# Altium PCB F407I.PcbDoc (part 2 of 2)
Units mm, origin at the board's own origin, x right, y up, seen from the top; angles counter-clockwise.
Board outline 140 x 100 mm, 2 copper layers (Top Layer, Bottom Layer); 101 components, 174 nets, 604 pads, 1189 vias.
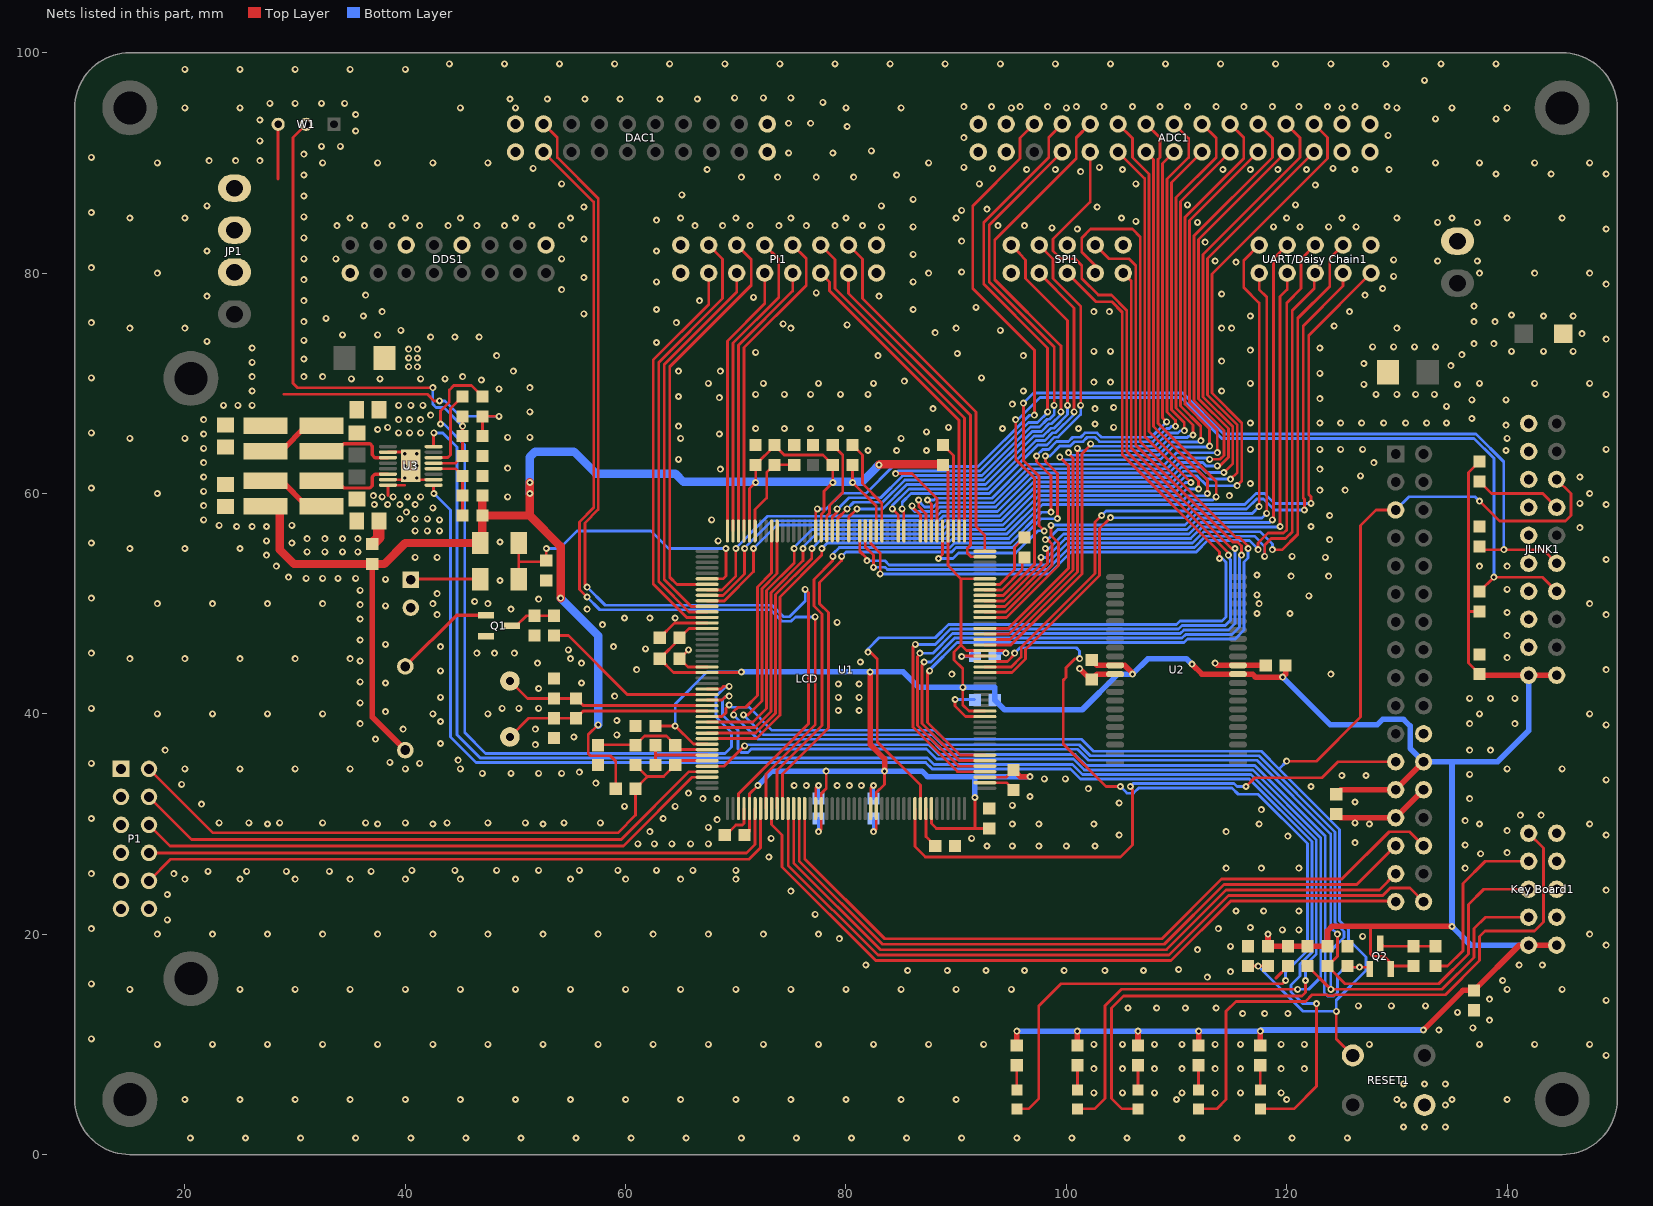
[diagram p2: the nets of this part, all layers, seen from the top]

## Via types
v1: diameter 0.635, hole 0.305, Top Layer to Bottom Layer, tented both sides, 1189 vias

## Nets (pads, with @x,y where several pads share a name; then routed paths per layer and width w, separated by ;. In a path a pad name is that pad's centre, name@x,y a point inside that pad or via, vN(x,y) a via of type N, cw(c..) or ccw(c..) an arc to the next point about the centre after c; other vN are vias at no path point) (continued)
GND: "Key Board1.3" "Key Board1.5" "Key Board1.7" "Key Board1.9" "UART/Daisy Chain1.10" ADC1.1 ADC1.2 ADC1.3 ADC1.4 ADC1.27 ADC1.28 ADC1.29 ADC1.30 BT1.2 C1.2 C2.1 C3.1 C4.2 C5.2 C6.2 C8.1 C9.1 C10.2 C11.2 C14.2 C15.2 C16.1 C17.1 C18.1 C19.1 C20.1 C21.1 C22.1 C23.1 C24.1 C25.1 C26.1 C27.1 C28.1 C29.1 C30.1 C31.1 C32.1 C33.1 C34.1 C35.1 C36.1 C37.1 C38.1 D3.1 DAC1.1 DAC1.2 DAC1.19 DAC1.20 DDS1.1 DDS1.6 DDS1.10 DDS1.16 JLINK1.4 JLINK1.6 JLINK1.8 JLINK1.10 JLINK1.12 JLINK1.14 JLINK1.16 JLINK1.18 JLINK1.20 JP1.2 JP1.3 LCD.22 LCD.26 LCD.27 P1.1 P1.3 P1.5 P1.7 P1.9 P1.11 P1.12 PI1.1 PI1.2 PI1.15 PI1.16 Power_IN1.1 Q1.2 R4.1 R7.1 R10.1 R12.1 R14.2 R21.1 R25.1 R26.1 RESET1.2 SPI1.1 SPI1.6 SPI1.10 U1.14 U1.22 U1.48 U1.61 U1.71 U1.90 U1.102 U1.113 U1.126 U1.135 U1.148 U1.158 U2.12 U2.34 U3.2 U3.7 U3.8 U3.10 U3.17 | length 91.5
  Top Layer w0.254: 38.425,59.825 U3.8@38.425,60.75 39.95,60.75 ; U3.7@38.425,61.25 U3.17@39.8,61.25 ; U3.2@38.425,63.75 U3.17@39.8,63.75 ; U3.17@41.2,61.25 U3.10@42.575,61.25 ; C20.1@63.1,46.9 64.45,48.25 U1.14@67.4,48.25 ; v1(65.7,45.8) C19.1@64.9,45 65.65,44.25 U1.22@67.4,44.25 ; C18.1@69.1,29 70,29.9 70.6,29.9 70.75,30.05 U1.48@70.75,31.4 ; U1.61@77.25,31.4 77.25,33.25 v1(77.5,33.5) ; U1.158@78.25,56.6 78.25,57.95 78.5,58.2 78.5,58.9 79.7,60.1 79.7,63.5 C21.1@78.8,64.4 ; C23.1@80.6,64.4 81.5,63.5 81.5,60.9 83.25,59.15 U1.148@83.25,56.6 ; U1.71@82.25,31.4 82.25,33.25 v1(82.5,33.5) ; C24.1@88.8,64.4 89.75,63.45 U1.135@89.75,56.6 ; v1(89.9,41.3) 89.9,40.7 90.85,39.75 U1.102@92.6,39.75 ; v1(90.5,45.2) 90.55,45.25 U1.113@92.6,45.25 ; U1.90@92.6,33.75 94.55,33.75 C25.1@95.2,33.1 ; U1.126@92.6,51.75 93.95,51.75 95.3,53.1 95.3,55.1 96.1,55.9 C2.1@96.3,55.9 ; 119,16 C33.1@120.1,17.1
  Top Layer w0.508: v1(101.2,44.1) 102.2,43.1 C28.1@102.3,43.1 102.8,43.6 U2.34@104.425,43.6 ; v1(113.5,44.6) 113.7,44.4 U2.12@115.575,44.4 C32.1@118.1,44.4 ; C30.1@124.5,30.9 124.834,30.566 LCD.27@129.887,30.566 LCD.26@132.427,33.106
  Top Layer w1.016: C29.1@37,55.4 37.6,56 C15.2@37.6,57.5
  Bottom Layer w0.254: C35.1@77.5,32.3 v1(77.5,33.5) ; C36.1@82.5,32.3 v1(82.5,33.5) ; v1(89.9,41.3) C38.1@91.65,41.3 ; v1(90.5,45.2) 91.15,45.2 91.45,45.5 C37.1@91.7,45.25
  other v1: 20.5,1.5 25.5,1.5 30.5,1.5 35.5,1.5 40.5,1.5 45.5,1.5 50.5,1.5 55.5,1.5 60.5,1.5 65.5,1.5 70.5,1.5 75.5,1.5 80.5,1.5 85.5,1.5 90.5,1.5 95.5,1.5 100.5,1.5 105.5,1.5 110.5,1.5 115.5,1.5 120.5,1.5 125.5,1.5 130.6,2.5 132.5,2.5 134.4,2.5 130.6,4.5 134.4,4.5 20,5 25,5 30,5 35,5 40,5 45,5 50,5 55,5 60,5 65,5 70,5 75,5 80,5 85,5 90,5 110,5 120,5 130,5 135,5 140,5 102.5,5.6 105.1,5.6 108,5.6 110.5,5.6 113.5,5.6 115.8,5.6 119.5,5.6 130.6,6.4 132.5,6.4 134.4,6.4 102.5,7.8 105.1,7.8 108,7.8 110.5,7.8 113.5,7.8 115.8,7.8 119.5,7.8 121.6,7.8 149,9 17.5,10 22.5,10 27.5,10 32.5,10 37.5,10 42.5,10 47.5,10 52.5,10 57.5,10 62.5,10 67.5,10 72.5,10 77.5,10 82.5,10 87.5,10 92.5,10 102.5,10 105.1,10 108,10 110.5,10 113.5,10 115.8,10 119.5,10 121.6,10 127.5,10 137.5,10 142.5,10 147.5,10 11.5,10.5 133.8,11.3 136.9,11.5 138.4,12.2 116,12.8 118,12.8 120.1,12.8 135.5,12.9 105.6,13.3 108.2,13.3 110.8,13.3 113.6,13.3 126.5,13.5 129.5,13.5 132.6,13.5 149,14 138.4,14.1 15,15 25,15 30,15 35,15 40,15 45,15 50,15 55,15 60,15 65,15 70,15 75,15 80,15 85,15 90,15 95,15 140,15 145,15 11.5,15.5 139.6,15.8 112.8,16.1 114.9,16.6 85.6,16.7 89.2,16.7 92.7,16.7 96.2,16.7 99.8,16.7 103.5,16.7 107,16.7 110.2,16.8 81.8,17.2 141.1,17.2 143.2,17.2 111.9,18.6 114.9,18.9 149,19 79.4,19.6 126.9,19.8 17.5,20 22.5,20 27.5,20 32.5,20 37.5,20 42.5,20 47.5,20 52.5,20 57.5,20 62.5,20 67.5,20 72.5,20 77.5,20 147.5,20 119.6,20.4 121.1,20.4 11.5,20.5 113.8,20.5 116.7,20.6 18.4,21.3 77.2,21.8 115.4,22.1 117.9,22.1 121.1,22.1 18.4,23.6 75,23.9 149,24 20,25 25,25 30,25 35,25 40,25 45,25 50,25 55,25 60,25 65,25 70,25 11.5,25.5 19,25.5 22.1,25.7 25.6,25.7 29.2,25.7 33.1,25.7 36.9,25.7 40.6,25.8 44.5,25.8 48.3,25.8 52.1,25.8 55.8,25.8 59.3,25.8 62.8,25.8 66.1,25.8 70,25.8 114.5,26 117.7,26 121.1,26 136.2,26 73,27 137.6,27.3 140,27.4 92.8,28 95.1,28 97.5,28 100,28 102.6,28 136.2,28.1 61.1,28.2 62.6,28.2 64.2,28.2 65.9,28.2 67.5,28.2 126.2,28.3 73.2,28.7 91.4,28.7 120.1,28.9 104.8,29 149,29 62.2,29.3 114.5,29.3 140,29.4 67.5,29.7 27.5,30 37.5,30 42.5,30 52.5,30 95.1,30 97.5,30 102.5,30 117.5,30 127.5,30 137.5,30 147.5,30 23.1,30.1 25.8,30.1 28.6,30.1 32.5,30.1 36.4,30.1 40,30.1 43.8,30.1 47.5,30.1 50.9,30.1 54.4,30.1 57.7,30.1 126.2,30.1 136.2,30.3 68.3,30.4 11.5,30.5 63.4,30.5 141.2,30.8 143.1,30.8 117.7,31.3 59.9,31.6 64.5,31.6 95.1,31.7 21.5,31.8 104.8,31.9 126.2,32 67,32.3 68.3,32.3 136.6,32.3 96.7,32.5 65.7,32.8 102,33.2 122.2,33.4 75.3,33.5 76.4,33.5 79.2,33.5 80.3,33.5 81.4,33.5 19.7,33.6 57.3,33.7 149,34 98,34.1 99.9,34.1 125,34.4 127.2,34.4 136.6,34.5 47,34.6 49.6,34.6 52.1,34.6 54.2,34.6 55.8,34.7 20,35 25,35 30,35 35,35 40,35 45,35 140,35 145,35 11.5,35.5 41.3,35.5 38.6,35.6 44.8,35.8 18.2,36.7 136.6,36.7 138.5,36.7 51.8,37.2 43.2,37.3 37.3,37.7 55.3,37.9 59.2,38.1 39.8,38.6 51.8,38.6 149,39 35.9,39.1 136.6,39.1 140.7,39.1 43.2,39.3 59.2,39.4 17.5,40 22.5,40 27.5,40 32.5,40 42.5,40 47.5,40 137.5,40 147.5,40 38.2,40.2 79.3,40.3 81.2,40.3 11.5,40.5 48.8,40.5 50.3,40.5 52.1,40.5 35.9,41 136.6,41.4 138.5,41.4 140.7,41.4 43.2,41.5 79.3,41.5 81.2,41.5 59,41.6 52.1,42.3 79.3,42.7 81.2,42.7 38.2,42.8 56,42.8 35.9,42.9 89.6,43.6 124,43.6 43.2,43.9 61,44 149,44 52,44.6 56,44.6 81.3,44.7 35.9,44.8 15,45 20,45 25,45 30,45 35,45 55,45 140,45.1 11.5,45.5 46.5,45.5 48.1,45.5 49.9,45.5 54.8,45.8 61.8,45.9 43.2,46.1 58.9,46.1 38.2,46.3 35.9,46.7 140,47.1 57.9,48.1 79.2,48.3 35.9,48.6 59.9,48.7 62.2,48.7 64.5,48.7 42.9,49 149,49 117.3,49.1 120.3,49.1 140,49.2 49.6,49.5 56.5,49.5 38.2,49.8 35.9,49.9 17.5,50 22.5,50 27.5,50 32.5,50 42.5,50 47.5,50 117.5,50 147.5,50 46.3,50.2 52.1,50.4 11.5,50.5 122,50.7 117.3,50.8 42.9,50.9 35.9,51.2 140,51.3 48.6,52.1 38.2,52.2 31,52.3 32.5,52.3 33.9,52.3 35.5,52.3 29.4,52.4 120.4,52.5 123.8,52.5 117.3,52.6 28.3,53.4 137.5,53.4 140,53.4 149,54 40.9,54.2 42.9,54.2 123.5,54.2 120.5,54.3 27.4,54.4 31.1,54.7 32.7,54.7 34.3,54.7 35.7,54.7 15,55 20,55 25,55 11.5,55.5 29.7,55.5 48.6,55.6 27.4,55.7 68.4,55.7 123.9,55.8 31.1,55.9 32.7,55.9 34.3,55.9 35.7,55.9 40.9,56.6 42,56.6 43.1,56.6 146.6,56.9 24.7,57 26.1,57 27.4,57 122.2,57 23.1,57.1 29.7,57.1 21.7,57.6 43.1,57.6 67.8,57.6 39.5,57.7 40.9,57.7 42,57.7 123.9,58 40.1,58.3 42.5,58.7 21.7,58.9 37.2,59 38.4,59 39.5,59 40.9,59 149,59 146.6,59.1 37.9,59.7 38.9,59.7 40.2,59.7 41.4,59.7 49.3,59.7 37.1,59.8 114.8,59.8 17.5,60 147.5,60 21.7,60.2 123,60.3 125.3,60.3 11.5,60.5 116.7,60.9 39.95,61.4 41.05,61.4 21.7,61.5 146.6,61.5 126.7,61.6 68.6,62.2 123,62.2 49.3,62.3 39.95,62.5 41.05,62.5 21.7,62.8 127.9,62.8 64.8,63.1 39.95,63.6 41.05,63.6 82,63.9 84.6,63.9 87.3,63.9 139.9,63.9 116.7,64 123,64 124.9,64 126.9,64 149,64 21.7,64.1 15,65 20,65 65,65 85,65 140,65 49.3,65.1 51.3,65.1 21.7,65.4 68.5,65.4 11.5,65.5 39.4,65.5 40.4,65.5 41.4,65.5 87.3,65.6 37.5,65.8 71.8,65.9 74.4,65.9 76.8,65.9 79.5,65.9 82,65.9 94.2,65.9 101.1,65.9 38.4,66 89.3,66 104.3,66 64.8,66.1 139.9,66.2 102.6,66.3 116.7,66.4 123,66.4 124.9,66.4 126.8,66.4 128.8,66.4 130.8,66.4 132.7,66.4 134.5,66.4 21.7,66.7 39.4,66.7 40.4,66.7 41.4,66.7 136.8,66.8 42.3,67.1 51.3,67.4 87.9,67.7 102.6,67.7 104.3,67.8 134.5,67.9 23.5,68 24.8,68 26.1,68 39.4,68 40.5,68 41.6,68 95.1,68.1 136.8,68.5 139.9,68.5 123,68.6 68.5,68.7 64.8,68.8 71.8,69 74.4,69 76.8,69 79.5,69 82,69 128.1,69 130,69 131.7,69 133.4,69 149,69 26.1,69.3 96.1,69.3 114.1,69.3 48.5,69.5 51.3,69.6 127,69.9 135.5,69.9 67.5,70 72.5,70 77.5,70 82.5,70 116.7,70 137.5,70 142.5,70 147.5,70 102.5,70.1 104,70.1 85.3,70.2 46.9,70.3 35.1,70.4 37.7,70.4 41.4,70.4 43.6,70.4 11.5,70.5 92.3,70.5 26.1,70.6 30.8,70.6 32.5,70.6 45.2,70.6 123,70.9 49.8,71.1 64.8,71.1 68.6,71.1 40.3,71.5 41.1,71.5 134.9,71.6 127,71.8 26.1,71.9 114.1,72 30.8,72.2 40.3,72.3 41.1,72.3 48.3,72.5 82.9,72.5 96.1,72.5 135.9,72.6 90.1,72.7 71.8,72.8 102.5,72.9 104,72.9 140.4,72.9 143.3,72.9 146,72.9 116.7,73 40.3,73.1 41.1,73.1 26.1,73.2 123,73.2 127.8,73.3 129.7,73.3 131.6,73.3 133.5,73.3 137,73.6 138.8,73.6 62.8,73.7 22,73.8 30.8,73.9 149,74 42.3,74.2 44.5,74.2 46.7,74.2 34.3,74.4 37.5,74.4 146.8,74.5 88.1,74.6 39.6,74.8 94,74.8 15,75 20,75 75,75 90,75 114.1,75 115,75 130,75 124.3,75.2 80.1,75.3 74.3,75.4 11.5,75.5 64.6,75.5 30.8,75.6 137,75.6 138.9,75.6 32.8,75.9 36.2,76.1 116.7,76.1 143.3,76.1 146,76.1 140.4,76.2 56.2,76.3 37.9,76.5 102.5,76.5 103.9,76.5 125.7,76.5 62.8,76.7 86.1,76.7 91.8,76.9 137,77 30.8,77.5 66.7,77.5 71.6,77.8 22,77.9 83,77.9 36.4,78 127.1,78 114.1,78.1 77.3,78.2 54.2,78.5 128.7,78.6 149,79 62.8,79.2 86.1,79.2 30.8,79.4 56.2,79.6 129.7,79.7 17.5,80 87.5,80 137.5,80 142.5,80 147.5,80 90.5,80.1 11.5,80.5 115.4,81 113.5,81.1 133.7,81.1 137.3,81.1 129.7,81.2 30.8,81.3 33.7,81.3 54.2,81.3 86.1,81.7 22,82 62.8,82 112.6,82.8 90.5,82.9 56.2,83.1 30.8,83.2 101,84 149,84 98.7,84.1 83.2,84.2 86.1,84.2 118.8,84.2 121.2,84.2 123.8,84.2 126.3,84.2 33.8,84.3 36.3,84.3 38.8,84.3 41.3,84.3 43.9,84.3 46.5,84.3 49,84.3 51.5,84.3 54.2,84.3 66.3,84.3 68.8,84.3 71.3,84.3 73.9,84.3 76.4,84.3 79,84.3 81.5,84.3 93.8,84.3 96.2,84.3 111.9,84.6 133.7,84.6 137.3,84.6 106.3,84.7 62.8,84.8 15,85 20,85 35,85 40,85 45,85 50,85 55,85 65,85 70,85 75,85 80,85 90,85 105,85 120,85 125,85 130,85 135,85 140,85 145,85 30.8,85.1 11.5,85.5 90.5,85.7 92.8,85.8 56.2,86 102.8,86 22,86.1 83.2,86.1 111,86.2 120.8,86.2 86.1,86.7 30.8,87 65.1,87.1 122.6,88 54.2,88.1 92.1,88.1 106.3,88.1 70.5,88.7 73.8,88.7 77.3,88.7 80.7,88.7 30.8,88.9 84.6,88.9 139,89 144,89 149,89 101.3,89.2 67.4,89.4 96.4,89.4 99,89.4 105.1,89.4 114.2,89.4 116.7,89.4 119.2,89.4 121.8,89.4 126.2,89.4 129.3,89.4 51.6,89.5 93.3,89.5 124.2,89.5 90.7,89.6 103,89.6 17.5,90 32.5,90 37.5,90 42.5,90 47.5,90 87.5,90 133.5,90 137.5,90 142.5,90 147.5,90 22.2,90.2 24.6,90.2 26.8,90.2 11.5,90.5 30.8,90.8 74.8,90.9 78.8,90.9 82.3,91.1 32.4,91.5 34.1,91.5 26.8,92 90.7,92.3 129.2,92.5 35.5,92.9 80.1,93.3 74.8,93.6 76.8,93.6 26.8,93.9 133.5,94 139,94 35.5,94.4 20,95 25,95 45,95 50,95 80,95 85,95 95,95 100,95 125,95 130,95 135,95 140,95 90.7,95.1 93.2,95.1 95.8,95.1 98.3,95.1 100.9,95.1 103.4,95.1 106,95.1 108.5,95.1 111,95.1 113.6,95.1 116.1,95.1 118.7,95.1 121.1,95.1 123.7,95.1 126.2,95.1 129.1,95.1 27.7,95.4 30,95.4 32.4,95.4 34.5,95.4 77.9,95.5 49.5,95.8 52.9,95.8 56.3,95.8 59.5,95.8 63.1,95.8 66.5,95.8 69.9,95.9 72.5,95.9 75,95.9 132.5,97.5 20,98.5 25,98.5 30,98.5 35,98.5 40,98.5 44,99 49,99 54,99 59,99 64,99 69,99 74,99 79,99 84,99 89,99 94,99 99,99 104,99 109,99 114,99 119,99 124,99 129,99 134,99 139,99
I2C_SCL: "Key Board1.4" R16.2 U1.167 | length 116.6
  Top Layer w0.254: v1(70.7,39.9) 71.056,39.9 71.078,39.878 72.378,41.177 72.378,51.352 73.75,52.725 U1.167@73.75,56.6 ; R16.2@121.9,17.1 v1(124,15) 134.1,15 137,17.9 137,20.5 138.04,21.54 141.96,21.54
  Bottom Layer w0.254: v1(70.7,39.9) 72.506,38.094 87.87,38.094 88.77,37.194 101.17,37.194 102.17,36.194 117.47,36.194 124.394,29.27 124.394,21.051 125.2,20.244 125.2,19.7 124,18.5 v1(124,15)
I2C_SDA: "Key Board1.6" R17.2 U1.168 | length 114.9
  Top Layer w0.254: v1(69.8,39.9) 69.8,40.2 70.2,40.6 70.9,40.6 71.971,41.671 71.971,51.521 73.25,52.799 U1.168@73.25,56.6 ; v1(124.6,20) 124.6,18 R17.2@123.7,17.1 125.3,15.5 133.8,15.5 136.5,18.2 136.5,22.7 137.88,24.08 141.96,24.08
  Bottom Layer w0.254: v1(69.8,39.9) 72.013,37.687 87.702,37.687 88.602,36.787 101.002,36.787 102.002,35.787 117.302,35.787 123.987,29.102 123.987,20.613 v1(124.6,20)
JTCK: JLINK1.9 R14.1 U1.137 | length 87.4
  Top Layer w0.254: v1(88.4,54.1) 88.75,54.45 U1.137@88.75,56.6 ; v1(96.1,68.2) 96.1,62.975 97.51,61.565 97.51,57.077 v1(97.993,56.593) ; R14.1@137.8,54.9 v1(139.7,54.9) 143.26,54.9 JLINK1.9@144.5,53.66
  Bottom Layer w0.254: v1(88.4,54.1) 89.7,54.1 90.2,54.6 95.4,54.6 97.407,56.607 97.993,56.607 v1(97.993,56.593) ; v1(96.1,68.2) 97.006,69.106 110.568,69.106 114.268,65.406 137.168,65.406 139.7,62.875 v1(139.7,54.9)
JTMS: JLINK1.7 R13.1 U1.124 | length 85.2
  Top Layer w0.254: U1.124@92.6,50.75 94.277,50.75 97.103,53.576 97.103,61.397 95.4,63.1 v1(95.4,66.7) ; R13.1@137.5,51.1 v1(138.8,52.4) 143.22,52.4 JLINK1.7@144.5,51.12
  Bottom Layer w0.254: v1(95.4,66.7) 95.4,66.5 97.6,68.7 110.4,68.7 114.1,65 137,65 138.8,63.2 v1(138.8,52.4)
KB_INT: "Key Board1.8" R20.2 | length 16
  Top Layer w0.254: R20.2@133.5,17.1 134.6,17.1 136,18.5 136,24.6 138.02,26.62 141.96,26.62
LCD_BL: LCD.23 U1.79 | length 54.7
  Top Layer w0.254: U1.79@86.25,31.4 86.25,27.95 87.2,27 104.9,27 106,28.1 106,33.1 105.8,33.3 v1(105.8,33.4) ; v1(116.3,33.4) 117.1,34.2 123.2,34.2 124.646,35.646 LCD.23@129.887,35.646
  Bottom Layer w0.254: v1(105.8,33.4) 106.074,33.674 115.226,33.674 115.5,33.4 116.2,33.4 v1@116.3,33.5
NetBT1_1: BT1.1 D1.1 | length 6.3
  Top Layer w0.254: BT1.1@40.5,52.23 D1.1@46.77,52.23
NetC1_1: C1.1 D1.2 D2.2 U1.6 | length 28.9
  Top Layer w0.254: D1.2@50.3,52.2 50.3,53.8 ; D2.2@50.3,55.5 50.3,53.8 ; v1(52.8,55) 52.8,53.8 50.3,53.8 ; U1.6@67.4,52.25 68.85,52.25 69.1,52.5 v1(69.1,55)
  Bottom Layer w0.254: v1(52.8,55) 54,55 55.597,56.597 62.303,56.597 63.9,55 v1(69.1,55)
NetC11_1: C11.1 L1.2 L2.1 | length 3.3
  Top Layer w0.508: L1.2@28.75,63.85 L2.1@31.05,66.15
NetC12_1: C12.1 R24.2 R25.2 U3.13 W1.2 | length 48.4
  Top Layer w0.254: W1.2@31,93.5 29.8,92.3 29.8,70 30.2,69.6 v1(42.5,69.6) ; U3.13@42.575,62.75 44.55,62.75 R25.2@45.2,63.4 R24.2@45.2,67
  Bottom Layer w0.254: v1(42.5,69.6) 42.5,68.1 42.8,67.8 43.5,67.8 v1(45.2,66.1)
NetC13_1: C13.1 R26.2 R27.2 U3.12 | length 6.5
  Top Layer w0.254: U3.12@42.575,62.25 44.55,62.25 R26.2@45.2,61.6 R27.2@45.2,58
NetC15_1: C15.1 L3.2 L4.1 | length 4.7
  Top Layer w0.508: L3.2@27.3,61.15 28.75,61.15 L4.1@31.05,58.85
NetDS1_1: DS1.1 R3.1 | length 2.2
  Top Layer w0.254: DS1.1@101,5.85 R3.1@101,8.1
NetDS2_1: DS2.1 R22.2 | length 2.2
  Top Layer w0.254: DS2.1@106.5,5.85 R22.2@106.5,8.1
NetDS2_2: DS2.2 U3.16 | length 155.4
  Top Layer w0.254: U3.16@42.575,64.25 42.575,65.475 v1(42.6,65.5) ; DS2.2@106.5,4.15 105.05,4.15 104.1,5.1 104.1,13.3 105.2,14.4 121.4,14.4 121.7,14.7 v1(121.7,15.8)
  Bottom Layer w0.254: v1(42.6,65.5) 43.4,65.5 44.7,64.2 44.7,38.1 46.8,36 87.4,36 88,35.4 100.551,35.4 101.463,34.487 116.763,34.487 122.687,28.563 122.687,18.187 121.7,17.2 v1(121.7,15.8)
NetDS3_1: DS3.1 R28.2 | length 2.2
  Top Layer w0.254: DS3.1@117.6,5.85 R28.2@117.6,8.1
NetDS3_2: DS3.2 U3.9 | length 136.2
  Top Layer w0.254: U3.9@42.575,60.75 42.575,60.025 v1(42.6,60) ; DS3.2@117.6,4.15 120.65,4.15 122.7,6.2 v1(122.7,13.7)
  Bottom Layer w0.254: v1(42.6,60) 44.1,58.5 44.1,37.9 46.406,35.594 87.232,35.594 87.832,34.994 100.382,34.994 101.295,34.081 116.595,34.081 122.281,28.395 122.281,18.356 121.2,17.275 121.2,16.2 120.4,15.4 120.4,14.756 121.456,13.7 v1(122.7,13.7)
NetDS5_1: DS5.1 R29.1 | length 2.2
  Top Layer w0.254: DS5.1@95.5,5.85 R29.1@95.5,8.1
NetJLINK1_13: JLINK1.13 R15.1 | length 8
  Top Layer w0.254: R15.1@137.5,61.1 138.6,60 143.24,60 JLINK1.13@144.5,58.74
NetKB_LED1_1: KB_LED1.1 R18.2 | length 2.2
  Top Layer w0.254: KB_LED1.1@112,5.85 R18.2@112,8.1
NetKB_LED1_2: "Key Board1.10" KB_LED1.2 | length 53
  Top Layer w0.254: KB_LED1.2@112,4.15 113.65,4.15 114.5,5 114.5,13 115.4,13.9 121.7,13.9 122.3,14.5 123.656,14.5 123.753,14.403 124.247,14.403 124.344,14.5 134.4,14.5 137.5,17.6 137.5,19.8 138,20.3 142.5,20.3 143.3,21.1 143.3,27.82 141.96,29.16
NetL2_2: L2.2 U3.3 | length 6.1
  Top Layer w0.305: L2.2@33.6,63.7 34.4,64.5 36.8,64.5 37,64.3 37,63.5 37.25,63.25 U3.3@38.425,63.25
NetL4_2: L4.2 U3.6 | length 6.1
  Top Layer w0.305: L4.2@33.6,61.3 34.4,60.5 36.8,60.5 37,60.7 37,61.5 37.25,61.75 U3.6@38.425,61.75
NetLS1_2: LS1.2 Q1.3 | length 9.3
  Top Layer w0.305: LS1.2@40,44.3 44.65,48.95 Q1.3@47.325,48.95
NetQ1_1: Q1.1 R9.1 R10.2 | length 3.8
  Top Layer w0.254: Q1.1@50.1,48 51,48.9 R9.1@53.5,48.9
NetQ2_1: Q2.1 R19.1 R20.1 | length 5.1
  Top Layer w0.254: Q2.1@128.5,19.175 128.775,18.9 R19.1@131.5,18.9 R20.1@133.5,18.9
NetR1_2: R1.2 R2.2 U1.38 | length 6.4
  Top Layer w0.254: R1.2@62.7,35.4 R2.2@62.7,37.2 ; 62.75,36.25 U1.38@67.4,36.25
NetR23_2: R23.2 U3.14 | length 7.4
  Top Layer w0.254: U3.14@42.575,63.25 43.85,63.25 44.1,63.5 44.1,67.7 R23.2@45.2,68.8
OSC_IN: C4.1 R6.2 U1.29 Y1.2 | length 18.8
  Top Layer w0.254: Y1.2@49.5,42.98 51.08,41.4 C4.1@53.5,41.4 R6.2@55.5,41.4 56.15,40.75 U1.29@67.4,40.75
OSC_OUT: C5.1 R6.1 U1.30 Y1.1 | length 18.9
  Top Layer w0.254: Y1.1@49.5,37.9 51.2,39.6 R6.1@55.5,39.6 56.15,40.25 U1.30@67.4,40.25
PA0: Q2.3 R21.2 U1.40 | length 81.7
  Top Layer w0.254: U1.40@67.4,35.25 68.95,35.25 v1(70.8,37.1) ; R21.2@125.6,17 v1(126.6,17) Q2.3@127.375,17
  Bottom Layer w0.254: v1(70.8,37.1) 70.9,37.2 87.5,37.2 88.4,36.3 100.8,36.3 101.8,35.3 117.1,35.3 123.5,28.9 123.5,15.5 123.4,15.4 123.4,14.7 123.7,14.4 124.3,14.4 124.6,14.7 124.6,16.3 125.3,17 v1(126.6,17)
PA1: P1.4 U1.41 | length 54.8
  Top Layer w0.254: P1.4@16.74,32.46 20.6,28.6 59.6,28.6 65.75,34.75 U1.41@67.4,34.75
PA2: P1.6 U1.42 | length 54
  Top Layer w0.254: P1.6@16.74,29.92 18.66,28 59.8,28 66.05,34.25 U1.42@67.4,34.25
PA3: DAC1.4 U1.47 | length 89.9
  Top Layer w0.254: DAC1.4@52.54,93.54 53.8,92.28 53.8,90.5 57.506,86.794 57.506,58.532 56.3,57.325 56.3,51.7 v1(56.5,51.5) ; U1.47@70.25,31.4 70.25,32.75 76.6,39.1 76.6,51 v1(76.3,51.3)
  Bottom Layer w0.254: v1(56.5,51.5) 58.145,49.855 73.301,49.855 74.353,48.803 74.847,48.803 76.3,50.256 v1(76.3,51.3)
PA4: P1.8 U1.50 | length 58.6
  Top Layer w0.254: P1.8@16.74,27.38 70.98,27.38 71.75,28.15 U1.50@71.75,31.4
PA5: P1.10 U1.51 | length 60.3
  Top Layer w0.254: P1.10@16.74,24.84 18.7,26.8 71.2,26.8 72.25,27.85 U1.51@72.25,31.4
PA6: DAC1.3 U1.52 | length 84.1
  Top Layer w0.254: DAC1.3@52.54,91 57.1,86.44 57.1,58.7 55.8,57.4 55.8,51.3 v1(56.5,50.6) ; U1.52@72.75,31.4 72.75,34.55 77.2,39 v1(77.2,48.8)
  Bottom Layer w0.254: v1(56.5,50.6) 57.651,49.449 73.132,49.449 74.184,48.397 75.016,48.397 75.419,48.8 v1(77.2,48.8)
PA7: LCD.33 U1.53 | length 67.1
  Top Layer w0.254: U1.53@73.25,31.4 73.25,29.95 74.2,29 74.2,26.1 82.695,17.605 109.505,17.605 114.915,23.015 LCD.33@129.887,23.015
PA9: "UART/Daisy Chain1.2" U1.120 | length 57.2
  Top Layer w0.254: U1.120@92.6,48.75 94.576,48.75 99.3,53.474 99.3,55.5 98.6,56.2 v1(98.6,57.1) ; v1(117.5,58.8) 117.5,77.3 116.1,78.7 116.1,81.14 117.5,82.54
  Bottom Layer w0.254: v1(98.6,57.1) 98.551,57.1 98.526,57.126 110.777,57.126 111.826,58.174 116.874,58.174 v1(117.5,58.8)
PA10: "UART/Daisy Chain1.1" U1.121 | length 53.7
  Top Layer w0.254: U1.121@92.6,49.25 94.502,49.25 98.703,53.452 98.703,55.403 98.307,55.8 v1(98.1,55.8) ; 117.5,80 117.5,78.5 118.183,77.817 v1(118.183,58.197)
  Bottom Layer w0.254: v1(98.1,55.8) 98.3,55.8 99.219,56.719 110.946,56.719 111.994,57.768 117.754,57.768 v1(118.183,58.197)
PA11: "UART/Daisy Chain1.4" U1.122 | length 55.9
  Top Layer w0.254: U1.122@92.6,49.75 94.427,49.75 98.297,53.62 98.297,54.803 v1(98.1,55) ; v1(118.7,57.6) 118.8,57.7 118.8,81.3 120.04,82.54
  Bottom Layer w0.254: v1(98.1,55) 98.425,55 99.738,56.313 111.114,56.313 112.163,57.362 118.462,57.362 v1(118.7,57.6)
PA12: "UART/Daisy Chain1.3" U1.123 | length 53.2
  Top Layer w0.254: U1.123@92.6,50.25 94.352,50.25 97.7,53.598 v1(97.7,54.2) ; v1(119.4,57) 119.4,77.86 120.04,78.5 120.04,80
  Bottom Layer w0.254: v1(97.7,54.2) 98.2,54.2 99.906,55.906 111.282,55.906 112.331,56.955 119.355,56.955 v1(119.4,57)
PA15: ADC1.8 U1.138 | length 55.3
  Top Layer w0.254: v1(84.5,61.8) 86,61.8 88.25,59.55 U1.138@88.25,56.6 ; v1(98.3,67.4) 98.3,73.2 92.5,79 92.5,84.6 98.4,90.5 98.4,92.32 ADC1.8@99.62,93.54
  Bottom Layer w0.254: v1(84.5,61.8) 84.732,62.032 92.158,62.032 96.565,66.438 97.39,66.438 v1@98.326,67.374
PB0: LCD.34 U1.56 | length 69.2
  Top Layer w0.254: U1.56@74.75,31.4 74.75,26.25 82.9,18.1 109.3,18.1 114.71,23.51 128.71,23.51 129.4,24.2 131.173,24.2 LCD.34@132.427,22.946
PB1: LCD.31 U1.57 | length 65.7
  Top Layer w0.254: U1.57@75.25,31.4 75.25,26.45 83.105,18.595 109.095,18.595 114.505,24.005 128.406,24.005 LCD.31@129.887,25.486
PB2: LCD.29 U1.58 | length 65.7
  Top Layer w0.254: U1.58@75.75,31.4 75.75,26.65 83.31,19.09 108.89,19.09 114.3,24.5 126.361,24.5 LCD.29@129.887,28.026
PB11: SPI1.5 U1.80 | length 88.5
  Top Layer w0.254: v1(82,45.6) 82.2,45.6 82.836,44.964 82.836,37.441 86.75,33.527 U1.80@86.75,31.4 ; SPI1.5@100.08,80 102.68,77.4 104.125,77.4 105.074,76.451 105.074,63.526 113.9,54.7 v1(113.9,54.1)
  Bottom Layer w0.254: v1(82,45.6) 82,45.9 83,46.9 88.1,46.9 89.294,48.094 109.995,48.094 110.327,48.426 114.126,48.426 114.497,48.797 114.497,53.759 114.156,54.1 v1(113.9,54.1)
PB12: ADC1.9 U1.92 | length 97.3
  Top Layer w0.254: v1@86.297,46.3 86.094,46.097 86.094,44.643 86.087,44.637 86.087,38.788 90.125,34.75 U1.92@92.6,34.75 ; ADC1.9@102.16,91 102.16,86.46 98.8,83.1 98.8,82 99.5,81.3 100.8,81.3 101.4,80.7 101.4,79.5 102.9,78 104.1,78 105.481,76.619 105.481,63.819 114.7,54.6 v1(114.7,54.4)
  Bottom Layer w0.254: v1(86.3,46.3) 88.1,46.3 89.487,47.687 110.163,47.687 110.495,48.019 114.426,48.019 114.903,48.496 114.903,53.978 114.7,54.181 v1(114.7,54.4)
PB13: SPI1.9 U1.93 | length 80.1
  Top Layer w0.254: v1(86.7,45.5) 86.8,45.5 86.5,45.2 86.5,44.475 86.494,44.468 86.494,38.956 90.199,35.25 U1.93@92.6,35.25 ; SPI1.9@105.16,79.537 105.623,79.537 105.887,79.273 105.887,64.113 115,55 v1(115.3,55)
  Bottom Layer w0.254: v1(86.7,45.5) 87.9,45.5 89.681,47.281 110.331,47.281 110.663,47.613 114.727,47.613 115.31,48.195 115.31,54.146 115.297,54.159 115.297,54.641 115.31,54.654 115.31,54.99 v1(115.3,55)
PB14: SPI1.8 U1.94 | length 83.9
  Top Layer w0.254: 86.9,44.4 86.9,39.124 90.274,35.75 U1.94@92.6,35.75 ; SPI1.8@102.62,82.54 103.86,81.3 105.7,81.3 106.294,80.706 106.294,64.406 115.103,55.597 115.547,55.597 115.897,55.247 115.897,54.928 115.9,54.925 v1(115.9,54.4)
  Bottom Layer w0.254: v1(87.1,44.7) 87.7,44.7 89.874,46.874 110.5,46.874 110.832,47.206 115.028,47.206 115.716,47.895 115.716,54.216 v1(115.9,54.4)
PB15: SPI1.7 U1.95 | length 91.3
  Top Layer w0.254: v1(87.6,43.9) 87.5,43.9 87.4,43.8 87.4,39.199 90.349,36.25 U1.95@92.6,36.25 ; SPI1.7@102.62,80 102.62,80.68 101.4,81.9 101.4,83.2 102.2,84 106,84 106.7,83.3 106.7,64.7 115.397,56.003 115.716,56.003 116.5,55.219 v1@116.5,54.9 ; v1@116.5,54.9 v1(116.5,55)
  Bottom Layer w0.254: v1(87.6,43.9) 87.6,44 90.068,46.468 110.668,46.468 111,46.8 115.328,46.8 116.123,47.594 116.123,53.778 116.497,54.153 116.497,55.003 v1(116.5,55)
PC0: ADC1.11 U1.32 | length 92.8
  Top Layer w0.254: U1.32@67.4,39.25 71.55,39.25 72.784,40.484 72.784,51.184 75.3,53.7 v1(75.3,55) ; ADC1.11@104.7,91 107.106,88.594 107.106,65.194 v1(111.3,61)
  Bottom Layer w0.254: v1@75.2,55 76.919,56.719 79.146,56.719 79.158,56.732 88.758,56.732 89.158,57.132 94.258,57.132 97.346,60.219 110.019,60.219 110.8,61 v1(111.3,61)
PC1: ADC1.12 U1.33 | length 96.7
  Top Layer w0.254: U1.33@67.4,38.75 71.726,38.75 73.19,40.215 73.19,50.99 76.1,53.9 v1(76.1,55) ; ADC1.12@104.7,93.54 106,92.24 106,90.5 107.513,88.987 107.513,65.631 112,61.144 v1(112,60.4)
  Bottom Layer w0.254: v1@76.061,55.082 77.291,56.313 79.314,56.313 79.327,56.326 88.927,56.326 89.327,56.726 94.427,56.726 97.514,59.813 110.313,59.813 110.9,60.4 v1(112,60.4)
PC2: ADC1.13 U1.34 | length 94.5
  Top Layer w0.254: U1.34@67.4,38.25 71.801,38.25 73.597,40.046 73.597,50.822 76.9,54.125 v1(76.9,55) ; ADC1.13@107.24,91 107.919,90.321 107.919,66.081 112.8,61.2 v1(112.8,60)
  Bottom Layer w0.254: v1(76.9,55) 77.806,55.906 79.482,55.906 79.495,55.919 89.095,55.919 89.495,56.319 94.595,56.319 97.682,59.406 110.606,59.406 111,59.8 112.6,59.8 v1(112.8,60)
PC3: ADC1.14 U1.35 | length 98.5
  Top Layer w0.254: U1.35@67.4,37.75 71.875,37.75 74.003,39.878 74.003,50.603 77.8,54.4 v1(77.8,55) ; ADC1.14@107.24,93.54 108.5,92.28 108.5,90.5 108.326,90.326 108.326,66.374 113.6,61.1 v1(113.6,59.7)
  Bottom Layer w0.254: v1(77.8,55) 78.3,55.5 79.651,55.5 79.663,55.513 89.263,55.513 89.663,55.913 94.763,55.913 97.851,59 110.9,59 111.294,59.394 113.294,59.394 v1(113.6,59.7)
PC4: ADC1.15 U1.54 | length 91.1
  Top Layer w0.254: U1.54@73.75,31.4 73.75,34.85 77.834,38.934 77.834,48.7 77.834,49.066 77.1,49.8 77.1,52.2 78.8,53.9 v1(78.8,54.3) ; v1(97.3,63.4) 97.3,62.9 98.6,61.6 v1(98.6,58.3) ; v1(109.1,66.5) 108.732,66.868 108.732,89.952 ADC1.15@109.78,91
  Bottom Layer w0.254: v1@78.8,54.5 79.394,55.094 79.819,55.094 79.832,55.106 89.432,55.106 89.832,55.506 94.932,55.506 97.725,58.3 v1(98.6,58.3) ; v1(97.3,63.4) 97.3,63.444 97.856,64 98.4,64 99.103,64.703 100.184,64.703 100.584,65.103 101.303,65.103 101.703,65.503 102.797,65.503 103.194,65.106 107.706,65.106 v1(109.1,66.5)
PC5: ADC1.16 U1.55 | length 95.3
  Top Layer w0.254: U1.55@74.25,31.4 74.25,34.55 78.4,38.7 78.4,48.7 78.4,49.2 77.606,49.994 77.606,51.906 79.6,53.9 v1(79.6,54.3) ; v1(98.1,63.4) 98.1,62.9 99.197,61.803 99.197,57.735 v1(99.184,57.722) ; ADC1.16@109.78,93.54 111.1,92.22 111.1,90.5 109.138,88.538 109.138,67.4 109.9,66.639 v1(109.9,66.1)
  Bottom Layer w0.254: v1(79.6,54.3) 80,54.7 89.6,54.7 90,55.1 95.1,55.1 97.7,57.7 99.161,57.7 v1(99.184,57.722) ; v1(98.1,63.4) 98.5,63.4 99.397,64.297 100.353,64.297 100.753,64.697 101.247,64.697 101.25,64.694 101.468,64.694 101.475,64.7 101.5,64.7 101.897,65.097 102.603,65.097 103,64.7 107.875,64.7 109.078,65.903 109.347,65.903 109.544,66.1 v1(109.9,66.1)
PC6: ADC1.17 U1.115 | length 59.7
  Top Layer w0.254: U1.115@92.6,46.25 94.95,46.25 101.406,52.706 101.406,63.606 102.2,64.4 v1(102.2,64.5) ; v1(110.7,65.7) 110.7,66.445 109.545,67.6 109.545,88.225 ADC1.17@112.32,91
  Bottom Layer w0.254: v1(102.2,64.5) 102.416,64.283 107.218,64.283 107.228,64.294 108.043,64.294 109.246,65.497 110.141,65.497 110.134,65.503 110.147,65.503 110.344,65.7 v1(110.7,65.7)
PC7: ADC1.18 U1.116 | length 64.4
  Top Layer w0.254: U1.116@92.6,46.75 94.875,46.75 101,52.875 v1(101,64.1) ; v1(111.5,65.3) 111.5,66.22 109.951,67.768 109.951,86.851 113.6,90.5 113.6,92.26 ADC1.18@112.32,93.54
  Bottom Layer w0.254: v1(101,64.1) 101.223,63.877 107.386,63.877 107.397,63.887 108.211,63.887 109.414,65.09 110.99,65.09 111.1,65.2 111.5,65.2 v1(111.5,65.3) v1@111.4,65.3
PC8: ADC1.19 U1.117 | length 62.7
  Top Layer w0.254: U1.117@92.6,47.25 94.801,47.25 100.594,53.043 100.594,63.206 100.2,63.6 v1(100.2,63.7) ; v1(112.2,64.8) 112.2,66.094 110.358,67.937 110.358,86.498 ADC1.19@114.86,91
  Bottom Layer w0.254: v1(100.2,63.7) 100.429,63.47 107.555,63.47 107.565,63.481 108.38,63.481 109.583,64.684 112.084,64.684 v1(112.2,64.8)
PC9: ADC1.20 U1.118 | length 67.4
  Top Layer w0.254: U1.118@92.6,47.75 94.726,47.75 100.187,53.211 100.187,62.513 v1(99.4,63.3) ; v1(113,64.3) 113,65.869 110.764,68.105 110.764,85.064 116.1,90.4 116.1,92.3 ADC1.20@114.86,93.54
  Bottom Layer w0.254: v1(99.4,63.3) 99.636,63.064 107.723,63.064 107.733,63.074 108.548,63.074 109.677,64.203 112.903,64.203 v1(113,64.3)
PC10: ADC1.21 U1.139 | length 62
  Top Layer w0.254: v1(87.4,59.4) 87.75,59.05 U1.139@87.75,56.6 ; v1(113.7,63.7) 113.7,65.744 111.17,68.273 111.17,84.77 ADC1.21@117.4,91
  Bottom Layer w0.254: v1(87.4,59.4) 87.978,59.4 88.148,59.57 93.248,59.57 96.336,62.658 108.958,62.658 110,63.7 v1(113.7,63.7)
PC11: ADC1.22 U1.140 | length 67.8
  Top Layer w0.254: 86.6,58.8 87.25,58.15 U1.140@87.25,56.6 ; 86.6,58.8 v1(86.6,59.4) ; v1(113,63.1) 113.944,63.1 114.297,63.453 114.297,65.722 111.587,68.431 111.587,83.387 118.7,90.5 118.7,92.24 ADC1.22@117.4,93.54
  Bottom Layer w0.254: v1(86.6,59.4) 86.6,59.3 87.136,58.764 87.917,58.764 88.317,59.164 93.417,59.164 96.504,62.251 109.151,62.251 110.126,63.226 112.874,63.226 v1(113,63.1)
PC12: ADC1.23 U1.141 | length 66.1
  Top Layer w0.254: v1(86.003,58.884) 86.003,58.797 86.75,58.05 U1.141@86.75,56.6 ; v1(113.7,62.5) 113.919,62.5 114.703,63.284 114.703,65.89 111.994,68.6 111.994,83.054 ADC1.23@119.94,91
  Bottom Layer w0.254: v1(86.003,58.884) 86.003,58.597 86.242,58.358 88.085,58.358 88.485,58.758 93.585,58.758 96.672,61.845 109.32,61.845 110.295,62.82 112.38,62.82 112.7,62.5 v1(113.7,62.5)
PC13: ADC1.24 U1.8 | length 90.5
  Top Layer w0.254: U1.8@67.4,51.25 68.75,51.25 70,52.5 v1(70,55) ; v1(114.3,61.9) 115.11,62.71 115.11,66.058 112.4,68.768 112.4,81.7 121.2,90.5 121.2,92.28 ADC1.24@119.94,93.54
  Bottom Layer w0.254: v1(70,55) 70,55.044 72.894,57.938 78.641,57.938 78.653,57.951 88.253,57.951 88.653,58.351 93.753,58.351 96.841,61.438 109.488,61.438 110.463,62.414 112.186,62.414 112.697,61.903 114.297,61.903 v1(114.3,61.9)
PC14: ADC1.25 U1.9 | length 88.9
  Top Layer w0.254: U1.9@67.4,50.75 68.85,50.75 70.8,52.7 v1(70.8,55) ; v1(114.9,61.3) 115.516,61.916 115.516,66.227 112.806,68.936 112.806,81.326 ADC1.25@122.48,91
  Bottom Layer w0.254: v1(70.8,55) 70.8,55.044 73.288,57.532 78.809,57.532 78.822,57.545 88.422,57.545 88.822,57.945 93.922,57.945 97.009,61.032 98.495,61.032 109.656,61.032 110.631,62.007 112.018,62.007 112.722,61.303 114.897,61.303 v1(114.9,61.3)
PC15: ADC1.26 U1.10 | length 93.4
  Top Layer w0.254: U1.10@67.4,50.25 68.95,50.25 71.6,52.9 v1(71.6,55) ; v1(115.5,60.7) 115.923,61.123 115.923,66.395 113.213,69.105 113.213,79.913 123.7,90.4 123.7,92.32 ADC1.26@122.48,93.54
  Bottom Layer w0.254: v1(71.6,55) 73.726,57.126 78.977,57.126 78.99,57.138 88.59,57.138 88.99,57.538 94.09,57.538 97.177,60.626 109.826,60.626 110.8,61.6 111.851,61.6 112.747,60.703 115.497,60.703 v1(115.5,60.7)
PD2: SPI1.4 U1.144 | length 39.1
  Top Layer w0.254: v1(85.1,58.6) 85.25,58.45 U1.144@85.25,56.6 ; SPI1.4@97.54,82.54 98.8,81.28 98.8,79.5 101.3,77 v1(101.3,68)
  Bottom Layer w0.254: v1(85.1,58.6) 85.1,59.2 85.9,60 93,60 97.406,64.406 98.232,64.406 98.935,65.11 99.254,65.11 101.297,67.153 101.297,67.997 v1(101.3,68)
PD3: SPI1.3 U1.145 | length 36.6
  Top Layer w0.254: v1(84.2,58.6) 84.75,58.05 U1.145@84.75,56.6 ; SPI1.3@97.54,80 100.7,76.84 v1(100.7,67.4)
  Bottom Layer w0.254: v1(84.2,58.6) 84.2,58.9 85.706,60.406 92.832,60.406 97.238,64.813 98.063,64.813 98.766,65.516 99.035,65.516 100.7,67.181 v1(100.7,67.4)
PD6: "UART/Daisy Chain1.6" U1.150 | length 71
  Top Layer w0.254: U1.150@82.25,56.6 82.25,55.45 83.1,54.6 v1(83.1,52.7) ; v1(117.4,54.9) 117.4,55.5 118.3,56.4 119.7,56.4 120,56.7 120,77.3 121.3,78.6 121.3,81.26 122.58,82.54
  Bottom Layer w0.254: v1(83.1,52.7) 83.1,52.831 83.243,52.687 98.437,52.687 100.437,54.687 111.787,54.687 112.818,55.718 116.626,55.718 117.4,54.944 v1(117.4,54.9)
PD7: "UART/Daisy Chain1.5" U1.151 | length 70
  Top Layer w0.254: U1.151@81.75,56.6 81.75,55.15 82.5,54.4 v1(82.5,53.3) ; v1(118,54.3) 118,55.3 118.6,55.9 119.9,55.9 120.5,56.5 120.5,76.6 122.5,78.6 122.5,79.92
  Bottom Layer w0.254: v1(82.5,53.3) 83.544,53.3 83.751,53.094 98.268,53.094 100.268,55.094 111.619,55.094 112.65,56.124 117.076,56.124 118,55.2 v1(118,54.3)
PDR_ON: R11.2 R12.2 U1.171 | length 8.5
  Top Layer w0.254: U1.171@71.75,56.6 71.75,58.55 72.8,59.6 72.8,61.9 R11.2@73.5,62.6 R12.2@75.3,62.6
PF8: R23.1 U1.26 | length 70.2
  Top Layer w0.254: v1(43.2,66.3) 43.2,67.5 44,68.3 44,69.4 44.4,69.8 46,69.8 R23.1@47,68.8 ; U1.26@67.4,42.25 68.65,42.25 68.9,42.5 v1(69.4,42.5)
  Bottom Layer w0.254: v1(43.2,66.3) 43.5,66.3 45.4,64.4 45.4,38.3 47.294,36.406 69.006,36.406 69.6,37 69.6,38.3 68.2,39.7 68.2,41.6 69.1,42.5 v1(69.4,42.5)
PF9: R9.2 U1.27 | length 16.1
  Top Layer w0.254: R9.2@53.5,47.1 54.8,47.1 60.15,41.75 U1.27@67.4,41.75
PF10: DS1.2 U1.28 | length 109
  Top Layer w0.254: U1.28@67.4,41.25 68.75,41.25 69.1,41.6 v1(69.4,41.6) ; DS1.2@101,4.15 102.55,4.15 103.5,5.1 103.5,13.5 105,15 v1(121,15)
  Bottom Layer w0.254: v1(69.4,41.6) 69.1,41.6 68.803,41.303 68.803,39.897 70.2,38.5 70.2,36.8 70.5,36.5 71.106,36.5 71.4,36.794 87.306,36.794 88.206,35.894 100.632,35.894 101.632,34.894 116.932,34.894 123.094,28.732 123.094,16.094 122,15 v1(121,15)
PF11: LCD.30 U1.59 | length 68.3
  Top Layer w0.254: U1.59@76.25,31.4 76.25,26.85 83.515,19.585 108.685,19.585 114.095,24.995 124.995,24.995 129.3,29.3 131.153,29.3 LCD.30@132.427,28.026
PG6: "UART/Daisy Chain1.7" U1.110 | length 62
  Top Layer w0.254: U1.110@92.6,43.75 95.075,43.75 96.303,44.978 96.303,45.853 103.013,52.562 103.013,56.813 v1(104,57.8) ; v1(121.6,58.5) 121.6,59.5 121.5,59.6 121.5,75.2 125.12,78.82 125.12,80
  Bottom Layer w0.254: v1(104,57.8) 110.877,57.8 111.658,58.581 116.356,58.581 117.275,59.5 117.9,59.5 118.9,58.5 v1(121.6,58.5)
PG7: "UART/Daisy Chain1.9" U1.111 | length 63.1
  Top Layer w0.254: U1.111@92.6,44.25 95.001,44.25 95.897,45.146 95.897,46.021 102.606,52.731 102.606,57.406 v1(103.2,58) ; v1(122.2,59.1) 122.2,59.7 122,59.9 122,74.34 127.66,80
  Bottom Layer w0.254: v1(103.2,58) 103.6,58.4 110.902,58.4 111.489,58.987 116.187,58.987 117.2,60 118,60 118.9,59.1 v1(122.2,59.1)
PG8: DS5.2 U1.112 | length 92.2
  Top Layer w0.254: U1.112@92.6,44.75 94.65,44.75 v1@95.35,45.45 ; DS5.2@95.5,4.15 96.55,4.15 97.5,5.1 97.5,13.5 99.5,15.5 119.6,15.5 v1(119.9,15.8) ; v1(101.2,45) 100.775,45 99.961,44.186 99.961,43.286 99.723,43.048 99.723,37.277 103.6,33.4 v1(104.9,33.4)
  Bottom Layer w0.254: v1(95.3,45.5) 95.8,46 100.9,46 101.2,45.7 v1(101.2,45) ; v1(104.9,33.4) 105.5,32.8 106.1,32.8 106.568,33.268 115.032,33.268 115.6,32.7 117.401,32.7 121.874,28.227 121.874,18.524 119.9,16.549 v1(119.9,15.8)
PG9: "UART/Daisy Chain1.8" U1.152 | length 73
  Top Layer w0.254: U1.152@81.25,56.6 81.25,54.75 81.9,54.1 v1(81.9,53.9) ; v1(118.7,54.9) 119.6,54.9 121,56.3 121,75.9 123.9,78.8 123.9,81.32 125.12,82.54
  Bottom Layer w0.254: v1(81.9,53.9) 83.519,53.9 83.919,53.5 98.1,53.5 100.1,55.5 111.451,55.5 112.481,56.531 117.569,56.531 118.7,55.4 v1(118.7,54.9)
PG11: SPI1.2 U1.154 | length 42.5
  Top Layer w0.254: U1.154@80.25,56.6 80.25,57.85 v1(81,58.6) ; SPI1.2@95,82.54 95.734,81.806 95.734,81.766 96.3,81.2 96.3,79.5 100.1,75.7 v1(100.1,68)
  Bottom Layer w0.254: v1(81,58.6) 83.3,58.6 85.513,60.813 92.663,60.813 97.07,65.219 97.895,65.219 98.598,65.922 98.867,65.922 100.097,67.153 100.097,67.997 v1(100.1,68)
PG13: ADC1.10 U1.156 | length 57.7
  Top Layer w0.254: U1.156@79.25,56.6 79.25,57.75 v1(80.1,58.6) ; v1(99.5,67.4) 99.5,73.4 93.5,79.4 93.5,83 100.9,90.4 100.9,92.28 ADC1.10@102.16,93.54
  Bottom Layer w0.254: v1(80.1,58.6) 80.7,59.2 83.319,59.2 85.338,61.219 92.495,61.219 96.901,65.626 97.727,65.626 98.43,66.329 98.648,66.329 99.5,67.181 v1(99.5,67.4)
PG14: ADC1.7 U1.157 | length 54.5
  Top Layer w0.254: U1.157@78.75,56.6 78.75,57.85 79.2,58.3 v1(79.2,58.6) ; v1(98.9,68) 98.9,73.3 93,79.2 93,84.38 ADC1.7@99.62,91
  Bottom Layer w0.254: v1(79.2,58.6) 79.256,58.6 80.262,59.606 83.151,59.606 85.097,61.553 85.097,61.572 85.151,61.626 92.327,61.626 96.733,66.032 97.558,66.032 98.261,66.735 98.479,66.735 98.9,67.156 v1(98.9,68)
PG15: ADC1.6 U1.160 | length 56.4
  Top Layer w0.254: U1.160@77.25,56.6 77.25,58.55 77.3,58.6 v1(77.4,58.6) ; ADC1.6@97.08,93.54 95.8,92.26 95.8,90.4 91.5,86.1 91.5,78.6 97.1,73 v1(97.1,67.1)
  Bottom Layer w0.254: v1(77.4,58.6) 78.2,58.6 79.613,60.013 81.813,60.013 84.238,62.438 91.99,62.438 96.652,67.1 v1(97.1,67.1)
PI0: PI1.14 U1.132 | length 32.9
  Top Layer w0.254: PI1.14@80.24,82.54 81.5,81.28 81.5,77.7 91.8,67.4 91.8,57 92.6,56.2 U1.132@92.6,54.75
PI1: PI1.13 U1.131 | length 31.9
  Top Layer w0.254: PI1.13@80.24,80 80.24,78.16 91.3,67.1 91.3,55.3 91,55 91,54.6 91.35,54.25 U1.131@92.6,54.25
PI2: PI1.12 U1.133 | length 31.3
  Top Layer w0.254: PI1.12@77.7,82.54 79,81.24 79,78.607 90.75,66.857 U1.133@90.75,56.6
PI3: PI1.11 U1.134 | length 28.6
  Top Layer w0.254: PI1.11@77.7,80 78.5,79.2 78.5,78.4 90.25,66.65 U1.134@90.25,56.6
PI4: PI1.10 U1.173 | length 28.8
  Top Layer w0.254: U1.173@70.75,56.6 70.75,73.25 76.4,78.9 76.4,81.3 PI1.10@75.16,82.54
PI5: PI1.9 U1.174 | length 25.4
  Top Layer w0.254: U1.174@70.25,56.6 70.25,73.45 75.16,78.36 PI1.9@75.16,80
PI6: PI1.8 U1.175 | length 28.2
  Top Layer w0.254: U1.175@69.75,56.6 69.75,73.65 73.9,77.8 73.9,81.26 PI1.8@72.62,82.54
PI7: PI1.7 U1.176 | length 24.8
  Top Layer w0.254: U1.176@69.25,56.6 69.25,73.85 72.62,77.22 PI1.7@72.62,80
PI8: PI1.6 U1.7 | length 37.4
  Top Layer w0.254: U1.7@67.4,51.75 64.65,51.75 64,52.4 64,71.5 71.4,78.9 71.4,81.22 PI1.6@70.08,82.54
PI9: PI1.5 U1.11 | length 35.4
  Top Layer w0.254: U1.11@67.4,49.75 65.95,49.75 63.5,52.2 63.5,71.7 70.08,78.28 PI1.5@70.08,80
PI10: PI1.4 U1.12 | length 39
  Top Layer w0.254: U1.12@67.4,49.25 65.75,49.25 63,52 63,71.9 68.8,77.7 68.8,81.28 PI1.4@67.54,82.54
PI11: PI1.3 U1.13 | length 36.5
  Top Layer w0.254: U1.13@67.4,48.75 65.55,48.75 62.5,51.8 62.5,72.1 67.54,77.14 PI1.3@67.54,80
RESET: C6.1 JLINK1.15 LCD.5 R8.2 RESET1.1 U1.31 | length 148.4
  Top Layer w0.254: U1.31@67.4,39.75 68.75,39.75 69.1,40.1 69.1,40.5 v1(69.4,40.8) ; C6.1@116.5,17.1 v1(117.4,17.1) R8.2@118.3,17.1 ; v1(120,35.7) 122.7,35.7 126.7,39.7 126.7,57.1 128.106,58.506 LCD.5@129.887,58.506 ; v1(124.5,13) 124.5,10.5 RESET1.1@126,9 ; v1(137.5,59.3) 139.3,57.5 145.3,57.5 145.8,58 145.8,59.98 JLINK1.15@144.5,61.28
  Bottom Layer w0.254: v1(69.4,40.8) 69.597,40.603 71.197,40.603 73.3,38.5 88.1,38.5 88.9,37.7 101.356,37.7 102.456,36.6 117.7,36.6 119.3,35 ; v1(117.4,17.1) 121.494,13.006 124.494,13.006 v1(124.5,13) 124.5,14 127.2,16.7 127.2,17.938 125.606,19.532 125.606,20.412 124.8,21.219 124.8,29.5 119.3,35 ; v1(120,35.7) 119.3,35 ; LCD.5@129.887,58.506 131.081,59.7 137.1,59.7 v1(137.5,59.3)
VCAP1: C3.2 U1.81 | length 3.8
  Top Layer w0.254: U1.81@87.25,31.4 87.25,28.85 C3.2@88.1,28
VCAP2: C2.2 U1.125 | length 4.9
  Top Layer w0.254: U1.125@92.6,51.25 94.15,51.25 96,53.1 C2.2@96,53.8
VCC: "Key Board1.1" "Key Board1.2" C13.2 C14.1 C18.2 C19.2 C20.2 C21.2 C22.2 C23.2 C24.2 C25.2 C26.2 C27.2 C28.2 C29.2 C30.2 C31.2 C32.2 C33.2 C34.2 C35.2 C36.2 C37.2 C38.2 D2.1 JLINK1.1 JLINK1.2 L3.1 LCD.24 LCD.25 LS1.1 Q2.2 R3.2 R5.2 R8.1 R11.1 R13.2 R15.2 R16.1 R17.1 R18.1 R19.2 R22.1 R27.1 R28.1 R29.2 U1.15 U1.23 U1.36 U1.49 U1.62 U1.72 U1.82 U1.91 U1.103 U1.114 U1.127 U1.136 U1.149 U1.159 U1.172 U2.11 U2.33 | length 520.6
  Top Layer w0.254: v1(57.5,39) 56.6,38.1 56.6,36.4 56.8,36.2 58.6,36.2 59.1,35.7 R5.2@59.1,33.2 ; C27.2@62.7,38.9 v1(64.5,38.9) 66.15,37.25 U1.36@67.4,37.25 ; U1.15@67.4,47.75 65.75,47.75 C20.2@64.9,46.9 64.9,46.8 C19.2@63.1,45 64.35,43.75 U1.23@67.4,43.75 v1@70.45,43.75 ; C18.2@71.25,29.35 U1.49@71.25,31.4 71.25,32.75 v1(72,33.5) ; U1.172@71.25,56.6 71.25,60.45 v1(71.8,61) C22.2@71.8,62.6 R11.1@73.5,64.3 ; R11.1@73.5,64.4 74.4,63.5 77.9,63.5 C21.2@78.8,62.6 v1(78.8,61) 77.997,60.197 77.997,58.353 77.75,58.106 U1.159@77.75,56.6 ; v1(77.5,29.3) 77.75,29.55 U1.62@77.75,31.4 77.75,32.75 78.2,33.2 v1(78.2,34.8) ; C23.2@80.6,62.6 v1(80.6,61) 82.75,58.85 U1.149@82.75,56.6 ; v1(82.5,29.3) 82.75,29.55 U1.72@82.75,31.4 82.75,32.85 83.5,33.6 v1(83.5,34.8) ; U1.82@87.75,31.4 87.75,30.05 88.2,29.6 91.7,29.6 ; C24.2@88.8,62.6 89.25,62.15 U1.136@89.25,56.6 89.25,53.45 90.45,52.25 ; v1(91.7,32.4) 91.7,29.6 ; U1.91@92.6,34.25 94.55,34.25 C25.2@95.2,34.9 ; U1.103@92.6,40.25 91.15,40.25 90.6,40.8 v1(90.6,42.4) 90.6,44.1 89.8,44.9 89.8,45.6 90.45,46.25 ; U1.127@92.6,52.25 90.45,52.25 ; C26.2@93,29.6 91.7,29.6 ; v1(94.5,45.5) 94.5,45.7 94.45,45.75 U1.114@92.6,45.75 90.95,45.75 90.45,46.25 ; 127.6,20.724 127.6,18.2 127.8,18 128.825,18 129.725,17.1 R19.2@131.5,17.1 ; C31.2@137.5,43.6 136.5,44.6 136.5,49.3 ; R13.2@137.5,49.3 136.5,49.3 ; R15.2@137.5,62.9 136.5,61.9 136.5,49.3 ; 90.45,46.25 90.45,52.25
  Top Layer w0.508: C29.2@37,53.5 37,39.7 LS1.1@40,36.7 ; v1(82.2,43.8) 82.2,37.2 83.5,35.9 v1(83.5,34.8) ; C25.2@95.2,34.9 95.8,34.3 v1(96.7,34.3) ; R29.2@95.5,9.9 v1(95.5,11.2) ; R3.2@101,9.9 v1(101,11.2) ; C28.2@102.3,44.9 102.8,44.4 U2.33@104.425,44.4 105.3,44.4 106,43.7 v1(106,43.6) ; R22.1@106.5,9.9 v1(106.5,11.2) ; v1(111.4,44.5) 112.3,43.6 U2.11@115.575,43.6 116.9,43.6 117.167,43.333 v1(119.633,43.333) 119.9,43.6 C32.2@119.9,44.1 ; R18.1@112,9.9 v1(112,11.2) ; R28.1@117.6,9.9 v1(117.6,11.2) ; v1(118.3,20) R8.1@118.3,18.9 R16.1@121.9,18.9 R17.1@123.7,18.9 123.7,20.3 124.124,20.724 127.6,20.724 134.976,20.724 v1(135,20.7) ; C30.2@124.906,33.106 LCD.25@129.887,33.106 LCD.24@132.427,35.646 ; v1(132.4,11.3) 136,14.9 C34.2@137,14.9 141.1,19 141.96,19 144.5,19 ; C31.2@137.6,43.5 JLINK1.2@141.96,43.5 JLINK1.1@144.5,43.5
  Top Layer w0.762: L3.1@28.6,58.7 28.6,54.9 29.9,53.6 C29.2@37,53.6 38.1,53.6 40,55.5 D2.1@46.8,55.5 47,55.7 R27.1@47,58 ; C13.2@47,59.8 R27.1@47,58 ; v1(51.3,61) v1(51.3,60) 51.3,58 ; v1(54.1,50.5) 54.1,55.2 51.3,58 ; v1@83,62.6 v1(83,62.602) 83.049,62.651 88.8,62.651 C24.2@88.8,62.6 ; R27.1@47,58 51.3,58
  Bottom Layer w0.254: v1(64.5,38.9) 64.5,40.9 67.4,43.8 v1(70.5,43.8) ; v1(77.5,29.3) C35.2@77.5,30.5 ; v1(82.5,29.3) C36.2@82.5,30.5 ; C37.2@93.75,45.5 v1(94.5,45.5)
  Bottom Layer w0.508: v1(70.5,43.8) v1(82.2,43.8) 85.2,43.8 86.6,42.4 v1(90.6,42.4) 93.5,42.4 C38.2@93.5,41.25 94.383,40.367 101.438,40.367 104.671,43.6 v1(106,43.6) 107.4,45 110.9,45 v1(111.4,44.5) ; v1(72,33.5) 73.3,34.8 v1(78.2,34.8) v1(83.5,34.8) 86.9,34.8 87.4,34.3 91.7,34.3 ; v1(91.7,32.4) 91.7,34.3 ; v1(95.5,11.2) v1(101,11.2) v1(106.5,11.2) v1(112,11.2) v1(117.6,11.2) 117.7,11.3 v1(132.4,11.3) ; v1(96.7,34.3) 91.7,34.3 ; v1(119.633,43.333) 123.967,39 128.2,39 128.7,39.5 130.6,39.5 131.2,38.9 131.2,36.873 LCD.24@132.427,35.646 135,35.646 ; 141.96,19 136.7,19 v1(135,20.7) 135,35.646 ; JLINK1.2@141.96,43.5 141.96,38.46 139.146,35.646 135,35.646
  Bottom Layer w0.762: v1(51.3,60) v1(51.3,61) 51.3,63.3 51.8,63.8 55.3,63.8 57.3,61.8 64.5,61.8 65.249,61.051 81.451,61.051 82.3,61.9 82.3,61.902 v1(83,62.602) ; v1(54.1,50.5) 57.5,47.1 v1(57.5,39)
VCCA: C7.1 P1.2 R1.1 R5.1 U1.39 | length 58.2
  Top Layer w0.254: P1.2@16.74,35 22.54,29.2 59.3,29.2 60.9,30.8 R5.1@60.9,33.2 61.95,34.25 61.95,34.3 ; R1.1@60.9,35.35 61.95,34.3 ; C7.1@64.5,35.35 63.45,34.3 61.95,34.3 ; C7.1@64.85,35.75 U1.39@67.4,35.75
VEXT: C10.1 C12.2 JP1.1 L1.1 R24.1 W1.3 | length 28.6
  Top Layer w0.254: 28.46,88.54 W1.3@28.46,93.5 ; 29,69 42,69 42.6,68.4 v1(43.1,68.4) ; C12.2@47,65.2 R24.1@47,67 v1(48.5,67)
  Bottom Layer w0.254: v1(43.1,68.4) 43.6,68.4 45,67 v1(48.5,67)
VSSA: C7.2 R2.1 R7.2 U1.37 | length 10.1
  Top Layer w0.254: R7.2@57.5,37.2 60.9,37.2 61.7,38 63.7,38 C7.2@64.5,37.2 ; C7.2@64.95,36.75 U1.37@67.4,36.75
pads on no net: JLINK1.3 JLINK1.5 JLINK1.11 JLINK1.17 JLINK1.19 JP1.4 LCD.0 LCD.32 RESET1.0 RESET1.3 U3.15 W1.1

## Polygon pours and split planes (outlines as drawn)
GND on Top Layer "Top Layer-No Net" (solid, remove dead copper, pour order 4): 10,0 150,0 150,100 10,100
GND on Bottom Layer "Top Layer-No Net" (solid, remove dead copper, pour order 6): 10,0 150,0 150,100 10,100

## Keep-outs
Keep-Out Layer:
  the board outline again, w0.381

## Other copper
Top Layer:
  rectangle net GND: 11,37 17,90
  region net NetC15_1: 36.3,56.7 36.3,58.3 30.4,58.3 30.4,56.7
  region net NetC11_1: 36.3,66.8 36.3,68.4 30.4,68.4 30.4,66.8
  region net VEXT: 25.9,65.5 25.9,66.9 22.9,66.9 22.9,65.5
  region net VCC: 25.4,58.1 25.4,59.5 22.9,59.5 22.9,58.1
  rectangle net VEXT: 24.5,86.5 29.3,88.9
  rectangle net VEXT: 27,66 29.3,86.5
  rectangle net GND: 22.9,60.1 24.5,64.9
  rectangle net +5V: 34.9,61.5 36.3,64.1
  rectangle net +5V: 36.1,62.1 39,62.9
  rectangle net +5V: 39,62.3 39.2,62.7
  rectangle net GND: 39.6,56.7 41.4,68.4
  rectangle net GND: 36.9,56.7 41.4,58.3
  rectangle net GND: 34.9,58.9 39.7,60.1
  rectangle net GND: 36.9,58.3 40.1,59.2
  rectangle net GND: 36.9,66.8 41.4,68.4
  rectangle net GND: 34.9,64.9 37.9,66.1
  rectangle net GND: 36.9,65.3 39.7,66.8
  rectangle net GND: 38.9,64.7 39.8,65.3
  rectangle net GND: 37.4,64.7 37.9,65.3
  rectangle net +5V: 35.2,71.2 36.6,73.4
  rectangle net GND: 37.1,71.2 41.4,73.4
  rectangle net GND: 11,9.5 12.5,37
  rectangle net GND: 20,96.5 140,99.5
  rectangle net GND: 146.5,9.5 149,90.5
  rectangle net GND: 20.5,1 93,12.5
  rectangle net GND: 99,0.5 130,3
Bottom Layer:
  rectangle net GND: 135,86 140,98.5
  rectangle net GND: 140,86 149,90

## Silkscreen, mask and mechanical layers (free items; w line width, h text height)
Top Overlay:
  text "DAC" at 60,97.25 h1.02
  text "ADC" at 108.5,97.25 h1.02
  text "EV" at 18.75,90.75 h1.02
  text "EVT" at 29.75,89.25 h1.02
  text "DDS" at 42.75,86.25 h1.02
  text "PI" at 73,86.25 h1.02
  text "SPI" at 98.75,86.25 h1.02
  text "UART" at 120.75,86.25 h1.02
  text "Power In" at 149.25,77.25 h1.02 r90
  text "JTAG" at 149.25,53 h1.02 r90
  text "Internal  ADC/DAC" at 11,36.5 h1.02 r270
  text "Keyboard" at 149.25,20.25 h1.02 r90
  text "IO1" at 94.7,1.5 h0.76
  text "IO2" at 100.1,1.5 h0.76
  text "Ext" at 105.6,1.5 h0.76
  text "Keyboard" at 109,1.5 h0.76
  text "Power" at 116,1.5 h0.76
Drill Drawing:
  text ".Legend" at 156,5 h1.52

## Text inside footprints (layer, text, board x,y; h text height)
LCD: Top Overlay "D14" at 133.987,41.561 h0.71 r270; Top Overlay "D7" at 127.601,48.981 h0.71 r270; Top Overlay "RS" at 133.987,64.061 h0.71 r270; Top Overlay "CS" at 127.601,64.094 h0.71 r270; Top Overlay "WR" at 127.601,61.554 h0.71 r270; Top Overlay "RST" at 127.601,59.395 h0.71 r270; Top Overlay "D1" at 127.601,56.347 h0.71 r270; Top Overlay "D2" at 133.987,56.436 h0.71 r270; Top Overlay "D3" at 127.601,53.934 h0.71 r270; Top Overlay "D4" at 133.987,53.936 h0.71 r270; Top Overlay "D5" at 127.601,51.394 h0.71 r270; Top Overlay "D6" at 133.987,51.311 h0.71 r270; Top Overlay "D8" at 133.987,49.186 h0.71 r270; Top Overlay "D9" at 127.601,46.441 h0.71 r270; Top Overlay "D13" at 127.487,41.561 h0.71 r270; Top Overlay "D12" at 133.987,44.061 h0.71 r270; Top Overlay "D15" at 127.601,38.948 h0.71 r270; Top Overlay "VDD" at 127.601,33.995 h0.71 r270; Top Overlay "V5" at 133.987,31.436 h0.71 r270; Top Overlay "GND" at 133.987,34.061 h0.71 r270; Top Overlay "VDD" at 133.987,36.561 h0.71 r270; Top Overlay "D10" at 133.987,46.686 h0.71 r270; Top Overlay "D0" at 133.987,58.936 h0.71 r270; Top Overlay "RD" at 133.987,61.561 h0.71 r270; Top Overlay "GND" at 133.987,39.061 h0.71 r270; Top Overlay "GND" at 127.601,31.582 h0.71 r270; Top Overlay "D11" at 127.601,44.028 h0.71 r270; Top Overlay "PEN" at 127.601,26.375 h0.71 r270; Top Overlay "CLK" at 133.987,23.936 h0.71 r270; Top Overlay "MOSI" at 133.987,29.186 h0.71 r270; Top Overlay "MO" at 133.987,25.936 h0.71 r270; Top Overlay "TCS" at 127.601,23.835 h0.71 r270; Top Overlay "MISO" at 127.601,29.296 h0.71 r270; Top Overlay "BL" at 127.601,36.027 h0.71 r270; Bottom Overlay "CS" at 126.331,64.475 h0.89 r90; Bottom Overlay "RS" at 128.236,64.348 h0.89 r90; Bottom Overlay "RD" at 128.236,61.681 h0.89 r90; Bottom Overlay "WR" at 126.331,61.681 h0.89 r90; Bottom Overlay "D0" at 128.236,59.141 h0.89 r90; Bottom Overlay "RST" at 126.331,59.522 h0.89 r90; Bottom Overlay "D1" at 126.331,56.474 h0.89 r90; Bottom Overlay "D2" at 128.236,56.601 h0.89 r90; Bottom Overlay "D3" at 126.331,54.061 h0.89 r90; Bottom Overlay "D4" at 128.236,54.061 h0.89 r90; Bottom Overlay "D5" at 126.331,51.394 h0.89 r90; Bottom Overlay "D6" at 128.236,51.394 h0.89 r90; Bottom Overlay "D7" at 126.331,48.981 h0.89 r90; Bottom Overlay "D8" at 128.236,48.981 h0.89 r90; Bottom Overlay "D9" at 126.331,46.568 h0.89 r90; Bottom Overlay "D10" at 128.236,46.949 h0.89 r90; Bottom Overlay "D11" at 126.331,44.282 h0.89 r90; Bottom Overlay "D12" at 128.236,44.282 h0.89 r90; Bottom Overlay "D13" at 126.331,41.742 h0.89 r90; Bottom Overlay "D14" at 128.236,41.615 h0.89 r90; Bottom Overlay "D15" at 126.331,39.075 h0.89 r90; Bottom Overlay "GND" at 128.236,39.075 h0.89 r90; Bottom Overlay "BL" at 126.331,36.281 h0.89 r90; Bottom Overlay "VDD" at 128.236,36.408 h0.89 r90; Bottom Overlay "VDD" at 126.331,34.376 h0.89 r90; Bottom Overlay "GND" at 128.236,33.741 h0.89 r90; Bottom Overlay "GND" at 126.331,31.709 h0.89 r90; Bottom Overlay "V5" at 128.236,30.947 h0.89 r90; Bottom Overlay "MI" at 126.331,28.534 h0.89 r90; Bottom Overlay "MO" at 128.236,28.661 h0.89 r90; Bottom Overlay "PEN" at 126.331,26.756 h0.89 r90; Bottom Overlay "NC" at 128.236,26.121 h0.89 r90; Bottom Overlay "TCS" at 126.331,23.962 h0.89 r90; Bottom Overlay "CLK" at 128.236,23.962 h0.89 r90
PI1: Top Overlay "2" at 61.647,81.93 h1.52; Top Overlay "1" at 62.079,79.416 h1.52
SPI1: Top Overlay "1" at 92.079,79.416 h1.52; Top Overlay "2" at 91.647,81.93 h1.52
"UART/Daisy Chain1": Top Overlay "1" at 114.579,79.416 h1.52; Top Overlay "2" at 114.147,81.93 h1.52